# EAGLE board SonarBoardV2 (EAGLE 7.2.0)
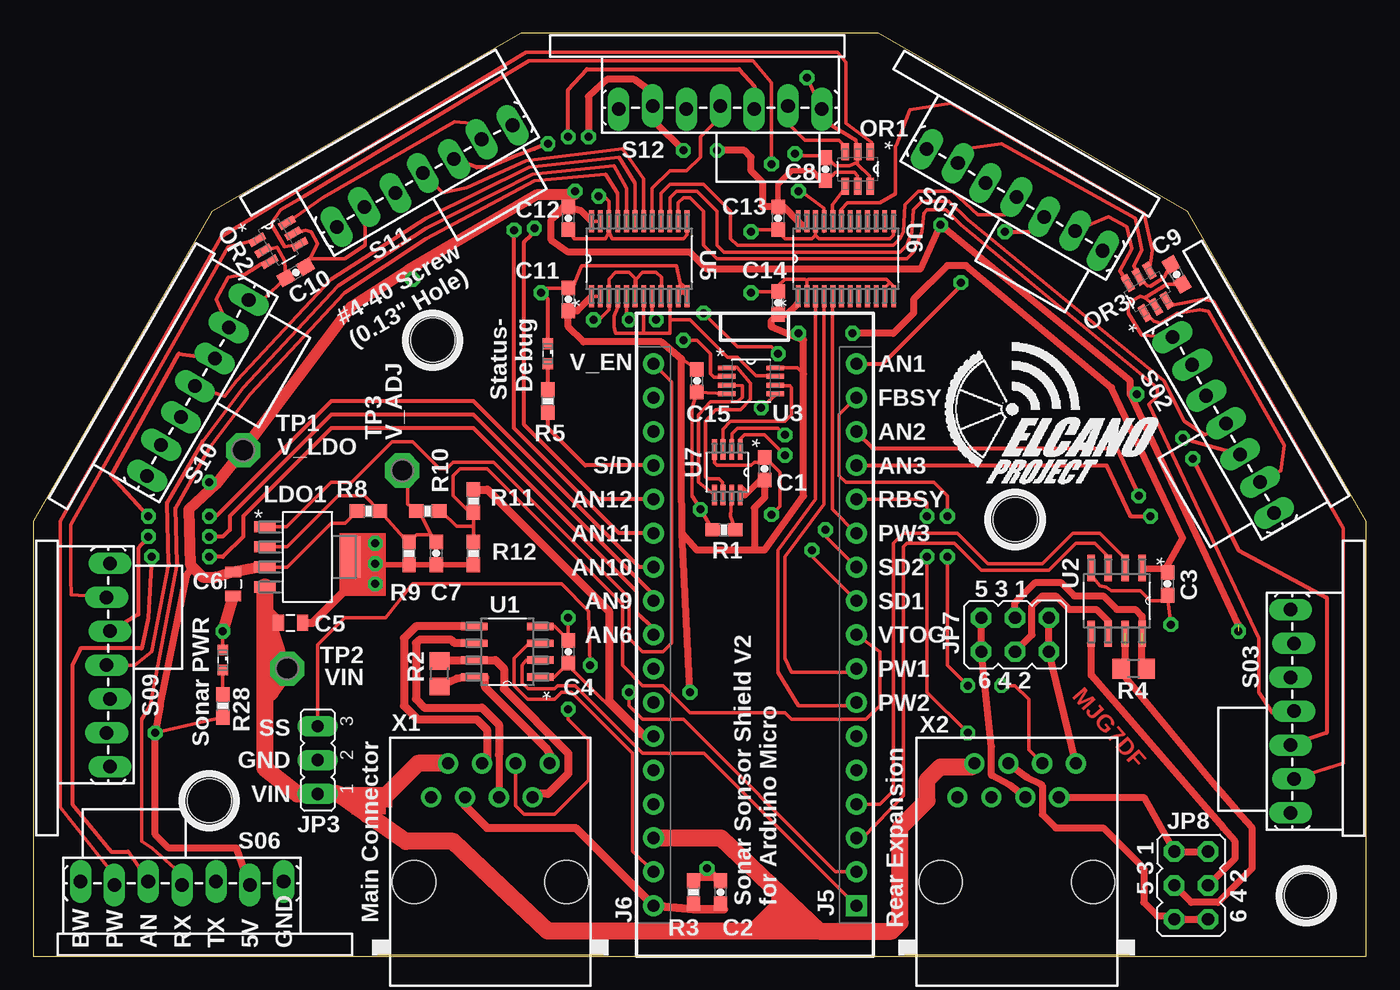
[diagram p0: board, top side]
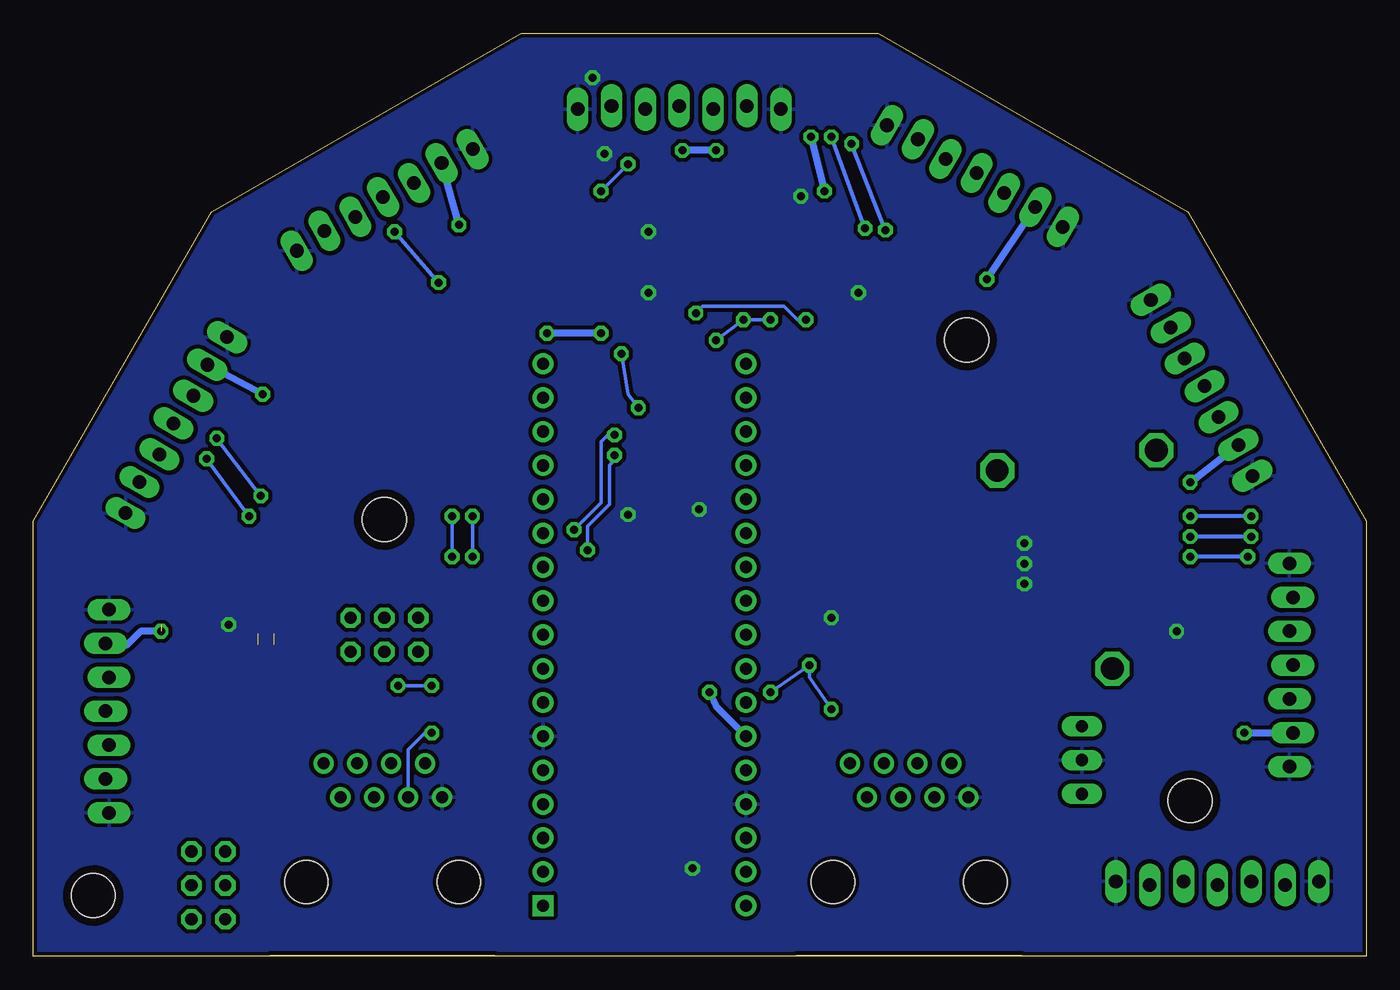
[diagram p1: board, bottom side, seen from below]

Size 100 x 69.24 mm. Coordinates in mm from the lower left corner, seen from the top.
Outline: 0,0 100,0 100,32.63 86.6,55.84 63.4,69.24 36.6,69.24 13.4,55.84 0,32.63 0,0
Copper layers (1*16): Top 0.035mm / dielectric 1.5mm / Bottom 0.035mm
Design rules "SparkFun *": minimum track width 8mil, minimum drill 20mil, track to track 10mil, track to pad 10mil, pad to pad 8mil, via to via 8mil, smd to smd 8mil, copper to edge 10mil, drill to drill 8mil, minimum pad ring 12mil, minimum via ring 10mil, stop-mask expansion 4mil, vias tented up to drill 25mil, thermal gap 10mil
Net classes: 0 default: width 0.254 mm, drill 0.508 mm, clearance 0.203 mm

## Footprints (pad centres in the part's own frame; a part is rotated, then mirrored left to right if it is on the bottom)
0603-CAP = smd 1.1 x 1: 1 -0.85,0; 2 0.85,0
0805 = smd 0.8 x 1.2: 1 -0.9,0; 2 0.9,0
HEAD17-NOSS = drill 0.914 pad 1.575 square: 1 0,0 | drill 0.914 pad 1.575: 2 2.54,0; 3 5.08,0; 4 7.62,0; 5 10.16,0; 6 12.7,0; 7 15.24,0; 8 17.78,0; 9 20.32,0; 10 22.86,0; 11 25.4,0; 12 27.94,0; 13 30.48,0; 14 33.02,0; 15 35.56,0; 16 38.1,0; 17 40.64,0
HEAD17-NOSS-1 = drill 0.914 pad 1.575: 1 0,0; 2 2.54,0; 3 5.08,0; 4 7.62,0; 5 10.16,0; 6 12.7,0; 7 15.24,0; 8 17.78,0; 9 20.32,0; 10 22.86,0; 11 25.4,0; 12 27.94,0; 13 30.48,0; 14 33.02,0; 15 35.56,0; 16 38.1,0; 17 40.64,0
JP2 = drill 0.914 long: 1 -2.54,0; 2 0,0; 3 2.54,0
JP3Q = drill 0.914 octagon: 1 -2.54,-1.27; 2 -2.54,1.27; 3 0,-1.27; 4 0,1.27; 5 2.54,-1.27; 6 2.54,1.27
SOT150P696X180-5N = smd 1.6 x 0.838: 1 -3.2,2.261; 2 -3.2,0.762; 3 -3.2,-0.762; 4 -3.2,-2.261 | smd 1.6 x 3.099: 5 3.2,0
SML0603 = smd 0.8 x 0.8: A 0.75,0; C -0.75,0
SOT95P280X145-6N = smd 1.27 x 0.559: 1 -1.295,0.94; 2 -1.295,0; 3 -1.295,-0.94; 4 1.295,-0.94; 5 1.295,0; 6 1.295,0.94
0603-RES = smd 1.1 x 1: 1 -0.85,0; 2 0.85,0
R0805 = smd 1.3 x 1.5: 1 -0.95,0; 2 0.95,0
XL-MAXSONAR-PACKAGE = drill 1.016 long: 1 -9.16,0.167; 2 -6.62,-0.087; 3 -4.08,0.167; 4 -1.54,-0.087; 5 1,0.167; 6 3.54,-0.087; 7 6.08,0.167
P1-17 = drill 1.702 pad 2.54 octagon: TP 0,0
SOIC127O620X175-8N = smd 1.981 x 0.559: 1 -2.464,1.905; 2 -2.464,0.635; 3 -2.464,-0.635; 4 -2.464,-1.905; 5 2.464,-1.905; 6 2.464,-0.635; 7 2.464,0.635; 8 2.464,1.905
SOP65P400X130-8N = smd 1.321 x 0.356: 1 -1.829,0.965; 2 -1.829,0.33; 3 -1.829,-0.33; 4 -1.829,-0.965; 5 1.829,-0.965; 6 1.829,-0.33; 7 1.829,0.33; 8 1.829,0.965
SOP65P640X120-24N = smd 1.651 x 0.356: 1 -2.819,3.581; 2 -2.819,2.921; 3 -2.819,2.286; 4 -2.819,1.626; 5 -2.819,0.965; 6 -2.819,0.33; 7 -2.819,-0.33; 8 -2.819,-0.965; 9 -2.819,-1.626; 10 -2.819,-2.286; 11 -2.819,-2.921; 12 -2.819,-3.581; 13 2.819,-3.581; 14 2.819,-2.921; 15 2.819,-2.286; 16 2.819,-1.626; 17 2.819,-0.965; 18 2.819,-0.33; 19 2.819,0.33; 20 2.819,0.965; 21 2.819,1.626; 22 2.819,2.286; 23 2.819,2.921; 24 2.819,3.581
SOP65P400X130-8N@1 = smd 1.549 x 0.356: 1 -1.702,0.965; 2 -1.702,0.33; 3 -1.702,-0.33; 4 -1.702,-0.965; 5 1.702,-0.965; 6 1.702,-0.33; 7 1.702,0.33; 8 1.702,0.965
STAND-OFF = hole 3.302: 0,0
RJ45-NO-SHIELD = drill 0.9 pad 1.4: 1 -4.445,6.35; 2 -3.175,8.89; 3 -1.905,6.35; 4 -0.635,8.89; 5 0.635,6.35; 6 1.905,8.89; 7 3.175,6.35; 8 4.445,8.89 | hole 3.251: -5.715,0; 5.715,0

## Placement (x,y rotation side)
C1  0.1uF  [0603-CAP]  54.86,36.58 90 top
C2  DNS  [0603-CAP]  51.56,4.83 90 top
C3  0.1uF  [0603-CAP]  85.09,27.94 270 top
C4  0.1uF  [0603-CAP]  40.13,22.86 90 top
C5  10uF, 25V  [0805]  19.3,25.02 0 top
C6  10uF, 25V  [0805]  14.99,27.94 270 top
C7  DNS  [0603-CAP]  30.23,30.23 270 top
C8  0.1uF  [0603-CAP]  59.44,59.05 90 top
C9  0.1uF  [0603-CAP]  85.78,51.15 300 top
C10  0.1uF  [0603-CAP]  19.68,51.31 210 top
C11  0.1uF  [0603-CAP]  40.13,49.28 90 top
C12  0.1uF  [0603-CAP]  40.13,55.37 270 top
C13  0.1uF  [0603-CAP]  55.88,55.37 270 top
C14  0.1uF  [0603-CAP]  55.88,49.02 90 top
C15  0.1uF  [0603-CAP]  49.78,43.18 270 top
J5  HEAD17-NOSS  [HEAD17-NOSS]  61.76,3.81 90 top
J6  HEAD17-NOSS-1  [HEAD17-NOSS-1]  46.52,3.81 90 top
JP3  [JP2]  21.34,14.73 90 top
JP7  [JP3Q]  73.66,24.13 180 top
JP8  [JP3Q]  86.87,5.33 270 top
LDO1  LP38693MP-ADJ  [SOT150P696X180-5N]  20.57,29.97 0 top
LED1  [SML0603]  14.22,22.23 270 top
LED2  [SML0603]  38.61,45.21 270 top
OR1  SN74LVC1G332DBVR  [SOT95P280X145-6N]  61.85,59.05 270 top
OR2  SN74LVC1G332DBVR  [SOT95P280X145-6N]  18.39,53.58 30 top
OR3  SN74LVC1G332DBVR  [SOT95P280X145-6N]  83.57,49.85 120 top
R1  0  [0603-RES]  51.82,32 180 top
R2  100  [R0805]  30.48,21.21 90 top
R3  DNS  [0603-RES]  49.53,4.83 270 top
R4  100  [R0805]  82.55,21.59 180 top
R5  600  [0603-RES]  38.61,41.66 90 top
R8  33k  [0603-RES]  25.15,33.4 180 top
R9  12k  [0603-RES]  28.19,30.23 90 top
R10  100k  [0603-RES]  29.59,33.4 180 top
R11  DNS  [0603-RES]  33.02,34.16 90 top
R12  DNS  [0603-RES]  33.02,30.23 90 top
R28  600  [0603-RES]  14.22,18.8 90 top
S01  MaxSonar  [XL-MAXSONAR-PACKAGE]  72.39,57.66 150 top
S02  MaxSonar  [XL-MAXSONAR-PACKAGE]  88.65,41.27 120 top
S03  MaxSonar  [XL-MAXSONAR-PACKAGE]  94.49,19.94 90 top
S06  MaxSonar  [XL-MAXSONAR-PACKAGE]  12.7,5.46 0 top
S09  MaxSonar  [XL-MAXSONAR-PACKAGE]  5.59,20.32 270 top
S10  MaxSonar  [XL-MAXSONAR-PACKAGE]  11.43,41.4 240 top
S11  MaxSonar  [XL-MAXSONAR-PACKAGE]  27.94,57.91 210 top
S12  MaxSonar  [XL-MAXSONAR-PACKAGE]  50,63.71 180 top
TP1  TPPAD1-17  [P1-17]  15.75,37.97 0 top
TP2  TPPAD1-17  [P1-17]  19.05,21.59 270 top
TP3  TPPAD1-17  [P1-17]  27.69,36.45 0 top
U1  DS8921M  [SOIC127O620X175-8N]  35.56,22.86 180 top
U2  DS8921M  [SOIC127O620X175-8N]  81.28,26.67 270 top
U3  SN74LVC3G14DCTR  [SOP65P400X130-8N]  53.85,43.18 0 top
U5  SN74LVCH8T245PWR  [SOP65P640X120-24N]  45.47,52.32 90 top
U6  SN74LVCH8T245PWR  [SOP65P640X120-24N]  60.96,52.32 90 top
U7  SN74LVC1G139DCTR  [SOP65P400X130-8N@1]  52.07,36.32 270 top
U$15  [STAND-OFF]  29.97,46.23 0 top
U$16  [STAND-OFF]  73.66,32.77 0 top
U$17  [STAND-OFF]  95.5,4.57 0 top
U$18  [STAND-OFF]  13.21,11.68 0 top
X1  RJ45-8L-B  [RJ45-NO-SHIELD]  34.29,5.59 0 top
X2  RJ45-8L-B  [RJ45-NO-SHIELD]  73.79,5.59 0 top

## Library data of the parts
C1-C15 R1 R3 R5 R8-R12 R28 = SparkFun-Passives
J5 J6 = SmartPrj
JP3 JP7 JP8 = jumper
LDO1 = ElcanoProject; MPN: LP38693MP-ADJ; OC_FARNELL: 1685718; OC_NEWARK: 41K7493; PACKAGE: SOT-223-5; SUPPLIER: NationalSemiconductor
LED1 LED2 = led
OR1-OR3 = ElcanoProject; MPN: SN74LVC1G332DBVR; OC_FARNELL: 1410355; OC_NEWARK: 87H2663; PACKAGE: SOT-23-6; SUPPLIER: TEXAS INSTRUMENTS
R2 R4 = rcl
S01-S03 S06 S09 S10-S12 = ElcanoProject
TP1-TP3 = testpad
U1 U2 = ElcanoProject; MPN: DS8921M; OC_FARNELL: -; OC_NEWARK: 41K1928; PACKAGE: SOIC-8; SUPPLIER: National Semiconductor
U3 = ElcanoProject; MPN: SN74LVC3G14DCTR; OC_FARNELL: -; OC_NEWARK: 76C4267; PACKAGE: SSOP-8; SUPPLIER: TEXAS INSTRUMENTS
U5 U6 = ElcanoProject; MPN: SN74LVCH8T245PWR; OC_FARNELL: 2120445; OC_NEWARK: 94T5041; PACKAGE: TSSOP-24; SUPPLIER: TEXAS INSTRUMENTS
U7 = ElcanoProject; MPN: SN74LVC1G139DCTR; OC_FARNELL: Unknown; OC_NEWARK: 94T5046; PACKAGE: SSOP-8; SUPPLIER: TEXAS INSTRUMENTS
U$15-U$18 = SparkFun-Electromechanical
X1 X2 = con-tycoelectronics; MF: TYCO ELECTRONICS; MPN: RJ45-8L-B; OC_FARNELL: 1279843; OC_NEWARK: 52K4445

## Nets
3V3: J6.16
+5V: C1.1 C3.1 C4.1 C11.1 C14.1 C15.1 J6.6 R11.2 U1.1 U2.1 U3.8 U5.1 U5.2 U6.1 U7.8
A0: J6.14 R5.1
AN1: J5.17 S01.3
AN2: J5.15 S02.3
AN3: J5.14 S03.3
AN6: J6.9 S06.3
AN9: J6.10 S09.3
AN10: J6.11 S10.3
AN11: J6.12 S11.3
AN12: J6.13 S12.3
AREF: J6.15
F_BSY: J5.16 X2.6
G01: U3.7 U5.4 U5.7 U5.10
G10: U3.5 U5.3 U5.6 U5.9
G11: U3.2 U5.5 U5.8
GND: C1.2 C2.2 C3.2 C4.2 C5.2 C6.2 C7.2 C8.2 C9.2 C10.2 C11.2 C12.2 C13.2 C14.2 C15.2 J5.6 J6.4 JP3.2 LDO1.5 LED1.C LED2.C OR1.2 OR1.6 OR2.2 OR3.2 R1.2 R3.1 R9.1 R12.1 S01.1 S01.7 S02.1 S02.7 S03.1 S03.7 S06.1 S06.7 S09.1 S09.7 S10.1 S10.7 S11.1 S11.7 S12.1 S12.7 U1.4 U2.4 U3.4 U5.11 U5.12 U5.13 U5.22 U6.2 U6.11 U6.12 U6.13 U6.22 U7.4 X1.1 X2.1
MISO: J6.2 U1.3
MISO+: U1.6 X1.5
MISO-: U1.5 X1.4
MOSI: J5.1 U1.2
MOSI+: R2.1 U1.8 X1.8
MOSI-: R2.2 U1.7 X1.7
MRX+_STX+: JP7.1 JP7.2 X2.8
MRX-_STX-: JP8.1 JP8.2 X2.7
MTX+_SRX+: JP7.5 JP7.6 X2.5
MTX-_SRX-: JP8.5 JP8.6 X2.4
N$2: LED2.A R5.2
N$14: LED1.A R28.2
N$15: U3.1 U7.6
N$18: U3.3 U7.5
N$19: U3.6 U7.3
N$20: R1.1 U7.7
N$43: OR1.4 U6.20
N$44: OR2.4 U6.21
N$45: OR3.4 U6.19
PW1: OR3.6 S01.2
PW2: OR3.1 S02.2
PW3: OR3.3 S03.2
PW6: OR1.1 S06.2
PW9: OR2.1 S09.2
PW10: OR2.3 S10.2
PW11: OR2.6 S11.2
PW12: OR1.3 S12.2
PW_OR1: J5.8 U6.4
PW_OR2: J5.7 U6.3
PW_OR3: J5.12 U6.5
R_BSY: J5.13 X2.3
RX: J5.4 U2.2
RX1: S01.4 U5.16
RX2: S02.4 U5.15
RX3: S03.4 U5.14
RX6: S06.4 U5.21
RX9: S09.4 U5.20
RX10: S10.4 U5.19
RX11: S11.4 U5.18
RX12: S12.4 U5.17
RX+: JP7.3 R4.1 U2.8
RX-: JP8.3 R4.2 U2.7
S_DEC_1: J5.10 U7.1
S_DEC_2: J5.11 U7.2
SCK: C2.1 J6.1 R3.2 X1.3
SS: J5.2 JP3.3 X1.6
TX: J5.3 U2.3
TX+: JP7.4 U2.6
TX-: JP8.4 U2.5
V_ADJ: C7.1 LDO1.2 R8.1 R9.2 R10.2 TP3.TP
V_EN: J6.17 LDO1.1
V_LDO: C6.1 C8.1 C9.1 C10.1 C12.1 C13.1 LDO1.3 OR1.5 OR2.5 OR3.5 R8.2 R28.1 S01.6 S02.6 S03.6 S06.6 S09.6 S10.6 S11.6 S12.6 TP1.TP U5.23 U5.24 U6.23 U6.24
V_TOGGLE: J5.9 R10.1 R11.1 R12.2
VIN: C5.1 J6.3 JP3.1 LDO1.4 TP2.TP X1.2 X2.2

## Tracks (layer width: path | path; a pad name or v marks a point on that pad's centre or on a via)
+5V  (via drill 0.6)
  Top 0.254: U2.1 84.75,29.13 C3.1 | U1.1 39.08,20.95 C4.1 40.13,21.84 45.47,16.51 45.85,16.51 | 57.28,48.9 57.28,49.4 U6.1 | 53.11,34.54 U7.8 53.21,34.8 53.21,35.18 53.34,35.05 53.34,34.54 | U5.1 U5.2 | 48.64,44.83 C15.1 | U3.8 57.33,44.15 57.78,43.69
  Top 0.406: 54.52,35.73 53.34,34.54
  Top 0.508: 57.28,48.9 56.55,48.17 C14.1 55.37,47.66 55.37,47.24 57.78,46.23 | 54.52,35.73 C1.1 54.86,34.42 54.1,33.66 54.1,30.48 | v49.28,19.81 48.65,31.74 | 48.65,31.74 48.64,36.32 48.64,44.83 47.12,46.1 41.27,46.1 40.13,47.24 C11.1 40.81,48.43 U5.1 | 57.78,46.23 57.78,43.69 57.78,34.54 54.86,30.48 54.1,30.48 | 57.78,46.23 v57.4,46.74 | 54.1,30.48 49.78,30.48 48.65,31.74 | 45.85,16.51 J6.6 | U2.1 84.96,29.08 86.23,31.37 80.9,42.67 69.98,51.82 68.58,51.82 66.04,49.28 66.04,48.26 64.52,46.74 v61.47,46.74
  Top 0.61: R11.2 34.08,35.01 43.18,25.91 43.18,19.18 45.85,16.51
  Bottom 0.508: v49.28,19.81 48.77,18.76 J6.6 | v57.4,46.74 v61.47,46.74
A0
  Top 0.305: J6.14 41.4,36.83 38.61,39.62 R5.1
AN1  (via drill 0.6)
  Top 0.305: J5.17 63.75,44.45 69.6,50.29 v69.6,50.55 | v72.9,54.36 74.72,54.36 S01.3
  Bottom 0.305: v69.6,50.55 v72.9,54.36
AN2  (via drill 0.6)
  Top 0.305: J5.15 61.76,39.33 62.99,38.1 81.28,38.1 v82.93,34.54 | v86.23,38.86 88.9,38.1 S02.3
  Bottom 0.305: v82.93,34.54 v86.23,38.86
AN3  (via drill 0.6)
  Top 0.305: J5.14 80.52,36.83 82.3,33.02 v83.82,33.02 | v87,37.34 90.42,30.48 97.03,26.92 97.03,16.76 S03.3
  Bottom 0.305: v83.82,33.02 v87,37.34
AN6  (via drill 0.6)
  Top 0.305: J6.9 46.52,24.6 45.29,25.73 45.29,27.36 33.02,39.62 22.35,39.62 15.75,33.02 15.75,31.5 14.22,29.97 v13.21,29.97 | v8.89,29.97 8.64,25.4 8.13,23.11 3.56,23.11 2.92,21.84 2.92,11.43 5.84,7.87 7.11,7.87 S06.3
  Bottom 0.305: v8.89,29.97 v13.21,29.97
AN9  (via drill 0.6)
  Top 0.305: J6.10 46.52,27.14 33.02,40.64 22.35,40.64 14.73,33.02 14.73,32 14.22,31.5 v13.21,31.5 | v8.64,31.5 7.87,30.61 7.87,25.65 S09.3
  Bottom 0.305: v8.64,31.5 v13.21,31.5
AN10  (via drill 0.6)
  Top 0.305: J6.11 45.47,29.21 33.02,41.66 22.35,41.66 13.72,33.02 v13.21,33.02 | v8.64,33.02 5.84,36.07 10.92,45.21 S10.3
  Bottom 0.305: v8.64,33.02 v13.21,33.02
AN11  (via drill 0.6)
  Top 0.305: J6.12 43.94,31.75 36.07,39.62 v36.07,54.48 | v38.61,60.96 38.23,60.83 37.59,60.58 35.94,59.94 34.16,59.18 33.27,59.18 S11.3
  Bottom 0.305: v36.07,54.48 v38.61,60.96
AN12  (via drill 0.6)
  Top 0.305: J6.13 42.42,34.29 36.83,39.88 36.83,53.59 37.34,54.1 37.34,54.36 v37.59,54.61 | v40.13,61.47 40.13,65.02 41.53,66.55 52.96,66.55 54.1,65.28 54.1,63.57 S12.3
  Bottom 0.305: v37.59,54.61 v40.13,61.47
F_BSY  (via drill 0.6)
  Top 0.254: J5.16 61.72,41.91 60.45,40.64 60.45,36.07 60.96,35.56 67.56,35.56 68.58,34.54 v68.58,33.02 | v68.58,29.97 68.58,21.84 v70.1,20.32 | v72.64,20.32 73.66,20.32 74.68,19.3 74.68,15.49 X2.6
  Bottom 0.254: v68.58,33.02 v68.58,29.97 | v72.64,20.32 v70.1,20.32
G01
  Top 0.254: U5.10 47.75,47.75 | 45.8,46.74 47.75,46.74 47.75,47.75 | 45.8,46.74 43.69,46.74 43.56,47.24 43.56,48.01 43.81,48.64 43.81,49.48 U5.4 | U5.7 45.8,46.74 | 47.75,47.75 49.28,47.75 52.07,44.96 52.83,44.96 54.23,43.56 55.63,43.56 U3.7
G10  (via drill 0.6)
  Top 0.254: 45.21,50.8 44.7,51.31 43.69,51.31 43.18,50.8 U5.3 43.18,48.51 42.55,47.88 42.16,47.88 v42.04,47.75 | 45.21,50.8 45.21,49.58 U5.6 45.14,50.72 45.21,50.8 | 45.21,50.8 45.72,51.31 46.74,51.31 47.12,50.93 47.12,49.53 U5.9 | v50.29,48.26 52.83,45.72 55.37,45.72 v55.88,45.21 | U3.5 55.68,42.09 v54.61,41.15
  Bottom 0.254: v42.04,47.75 42.67,47.75 43.69,48.77 49.78,48.77 v50.29,48.26 | v55.88,45.21 55.37,42.16 v54.61,41.15
G11  (via drill 0.6)
  Top 0.254: U5.5 44.5,47.8 v44.7,47.75 | U5.8 46.43,48.06 v46.74,47.75 | v48.77,46.23 49.78,46.23 50.8,45.21 50.8,43.69 51.05,43.43 51.94,43.43 U3.2
  Bottom 0.254: v44.7,47.75 v46.74,47.75 v48.77,46.23
GND  (via drill 0.6, 0.6 pad 0.3)
  Top 0.254: LED1.C v14.22,24.38 | v25.65,30.99 24.79,30.99 LDO1.5 | 23.88,29.46 v25.65,29.46 25.74,29.38 | v25.65,27.94 24.89,27.94 23.88,28.96 | OR1.2 61.85,59.44 62.74,58.55 62.74,57.81 OR1.6 | OR1.2 61.85,59.56 61.21,59.31 60.2,59.31 59.6,59.91 C8.2 | 59.31,60.29 59.31,60.07 57.28,60.07 v57.15,60.2 | OR2.2 18.29,53.19 18.87,52.2 C10.2 18.88,50.88 17.27,49.28 16.18,49.28 S10.1 | OR3.2 83.39,49.4 | 83.39,49.4 83.06,49.53 82.17,49.02 82.17,48.26 83.19,46.61 S02.7 | OR1.2 61.72,61.21 59.44,62.61 S12.1 v58.04,65.91 | C9.2 85.22,50.42 85.04,50.42 83.39,49.4 | U2.4 79.38,28.57 80.01,27.81 80.52,27.69 80.9,27.43 83.06,27.43 83.82,26.67 84.67,26.67 C3.2 v85.34,24.89 | U1.4 39.12,24.77 40.13,23.75 C4.2 v40.13,25.4 | 43.18,54.36 U5.22 43.18,56.64 42.93,56.9 42.55,56.9 v42.42,57.02 | 43.18,54.36 42.93,53.85 40.55,53.85 C12.2 | 48.51,50.55 48.26,51.82 41.15,51.82 40.47,50.13 C11.2 38.44,50.13 v38.1,49.78 | U5.12 48.77,49.78 48.77,50.29 48.51,50.55 | 48.51,50.55 48.51,50.16 48.64,50.04 48.64,49.76 U5.11 | U5.13 49.05,54.13 48.77,53.85 43.43,53.85 43.18,54.36 | 58.67,54.1 58.42,53.85 56.39,53.85 55.88,54.36 C13.2 54.01,54.52 v53.85,54.36 | U6.22 58.67,54.1 | 58.67,54.1 58.93,53.85 64.26,53.85 64.52,54.1 64.52,55.12 U6.13 | v53.85,49.78 53.94,49.87 C14.2 55.88,50.29 56.39,50.8 57.91,50.8 58.04,50.67 | 58.04,50.67 U6.2 | 64.26,50.55 64.01,50.8 58.17,50.8 58.04,50.67 | U6.12 64.54,50.27 64.26,50.55 | 64.26,50.55 63.88,50.16 U6.11 | U7.4 51.1,37.03 51.31,36.83 53.85,36.83 54.1,37.08 54.52,37.08 C1.2 54.9,37.43 56.01,36.32 56.01,33.78 v55.37,33.15 | R1.2 v50.04,33.53 49.4,34.54 49.4,41.15 C15.2 U3.4
  Top 0.305: LED2.C 38.61,49.28 v38.1,49.78
  Top 0.406: 25.74,29.38 R9.1 C7.2 R12.1
  Top 0.508: 51.05,5.97 51.05,6.1 v50.55,6.6
  Top 0.61: C5.2 20.95,25.02 23.88,27.94 23.88,28.96 23.88,29.46 23.88,29.87 LDO1.5
  Top 0.635: R3.1 50.04,5.97 51.05,5.97 C2.2
  Top 0.813: C6.2 v14.22,24.38
  pour Bottom (isolate 0.305): 0,0 100.08,0 100.08,32.51 86.61,55.88 63.37,69.22 36.58,69.22 13.46,55.88 0,32.64
MISO
  Top 0.254: U1.3 37.21,23.5 36.07,22.35 36.07,20.32 37.08,19.3 39.12,19.3 39.62,19.81 40.39,19.81 44.96,15.24 44.96,7.91 J6.2
MISO+
  Top 0.508: 34.92,15.11 X1.5
  Top 0.61: U1.6 31.62,23.5 31.37,23.75 28.96,23.75 28.7,23.5 28.7,19.3 29.34,18.67 33.66,18.67 34.92,17.4 34.92,15.11
MISO-
  Top 0.61: U1.5 28.7,24.77 27.81,23.88 27.81,18.8 28.83,17.78 33.27,17.78 34.04,17.02 34.04,14.86 X1.4
MOSI
  Top 0.254: U1.2 36.96,22.23 36.65,21.84 36.65,20.5 37.11,20.07 39.09,20.07 39.34,20.32 40.64,20.32 45.72,15.24 50.33,15.24 J5.1
MOSI+
  Top 0.61: R2.1 31.79,20.87 32.26,20.95 U1.8 | U1.8 33.27,20.95 | X1.8 38.99,14.73 38.48,15.62 33.91,20.19 33.91,20.93 33.12,20.93 U1.8
MOSI-
  Top 0.61: R2.2 30.48,22.35 30.61,22.23 U1.7 34.67,22.23 35.31,21.59 35.31,20.07 40.13,15.24 40.13,13.72 38.61,12.19 37.72,12.19 X1.7
MRX+_STX+
  Top 0.508: X2.8 JP7.2 JP7.1
MRX-_STX-
  Top 0.508: X2.7 83.31,11.94 JP8.1 JP8.2
MTX+_SRX+
  Top 0.508: X2.5 73.28,12.83 71.88,13.59 71.88,15.75 JP7.6 JP7.5
MTX-_SRX-
  Top 0.508: X2.4 74.55,13.46 75.56,12.95 75.69,12.83 75.69,10.67 76.71,9.65 80.26,9.65 83.31,6.6 83.31,4.06 84.33,3.05 85.34,3.05 JP8.5 JP8.6
N$1
  pour Top: 23.37,12.19 26.42,12.19 26.42,9.65 22.86,12.19
N$2
  Top 0.305: R5.2 LED2.A
N$14
  Top 0.254: LED1.A R28.2
N$15
  Top 0.254: U7.6 51.69,35.56 51.44,35.81 50.67,35.81 50.42,35.94 50.42,40.13 51.18,41.02 53.06,41.02 53.82,41.78 53.82,43 52.78,44.2 52.7,44.2 U3.1
N$18
  Top 0.254: U7.5 49.91,35.56 49.91,40.64 50.8,41.6 52.83,41.6 53.19,41.96 53.19,42.8 U3.3
N$19
  Top 0.254: U7.3 51.74,39.55 52.32,40.13 56.39,40.13 56.9,40.64 56.9,42.67 56.77,42.8 55.73,42.8 U3.6
N$20
  Top 0.254: U7.7 52.32,33.02 R1.1
N$43
  Top 0.254: OR1.4 60.91,57.61 59.94,56.39 59.94,54.43 U6.20
N$44  (via drill 0.6)
  Top 0.254: OR2.4 18.87,53.21 17.86,54.94 18.54,56.01 20.32,57.02 37.21,67.18 53.98,67.18 55.37,65.53 v55.37,59.44 | U6.21 59.31,54.41 59.31,56.13 57.4,57.53 v57.4,57.4
  Bottom 0.254: v55.37,59.44 v57.4,57.4
N$45
  Top 0.254: OR3.4 83.95,52.96 83.31,55.75 68.83,64.01 65.79,63.5 64.77,60.83 64.69,60.76 64.69,57.2 63.5,56.52 61.09,56.52 60.58,56.01 60.58,55.19 U6.19 60.71,54.46
PW1
  Top 0.254: OR3.6 81.53,51.44 82.42,53.09 82.04,54.74 80.64,55.5 S01.2
PW2
  Top 0.254: OR3.1 84.07,47.62 84.58,47.5 85.85,48.26 87.5,48.51 88.14,48.39 93.85,38.35 93.6,36.45 S02.2
PW3
  Top 0.254: OR3.3 85.6,48.9 87.76,49.28 88.52,49.15 98.3,32.13 98.3,14.48 S03.2
PW6
  Top 0.254: S06.2 6.08,6.11 2.03,11.18 2.03,32.64 14.1,53.98 36.96,67.82 60.33,67.82 60.96,67.06 60.96,62.48 62.87,61.09 62.87,60.43 OR1.1 62.74,60.83
PW9
  Top 0.254: S09.2 2.83,27.14 2.79,28.32 2.79,32.38 14.61,53.21 OR2.1
PW10
  Top 0.254: S10.2 13.72,49.28 14.61,50.93 15.88,51.18 17.14,51.94 OR2.3
PW11
  Top 0.254: OR2.6 21.72,56.9 31.62,62.61 32.89,62.48 S11.2
PW12
  Top 0.254: S12.2 56.62,62.51 57.91,61.21 60.45,61.21 60.71,60.96 60.71,60.55 OR1.3 60.96,60.4
PW_OR1
  Top 0.254: U6.4 59.33,33.93 56.39,29.97 56.39,22.35 56.9,21.34 61.51,21.34 J5.8
PW_OR2
  Top 0.254: U6.3 58.67,34.29 55.88,30.48 55.88,21.34 57.4,18.8 61.51,18.8 J5.7
PW_OR3
  Top 0.254: J5.12 61.72,31.75 59.94,33.53 59.94,49.45 U6.5
R_BSY  (via drill 0.6)
  Top 0.254: J5.13 66.8,34.29 67.06,34.04 v67.06,33.02 | v67.06,29.97 67.06,19.81 v70.1,16.76
  Bottom 0.254: v67.06,33.02 v67.06,29.97 | v70.1,16.76 70.61,16.76 71.88,15.49 X2.3
RX
  Top 0.254: U2.2 81.92,29.84 80.01,31.75 77.98,31.75 75.69,29.46 71.63,29.46 69.34,31.75 65.28,31.75 64.52,30.99 64.52,12.45 63.5,11.43 J5.4
RX1
  Top 0.254: U5.16 47.09,57.25 47.75,57.91 50.29,57.91 52.32,55.88 52.32,53.85 52.83,53.34 64.52,53.34 65.02,53.85 65.28,54.36 65.41,56.39 66.42,57.4 68.96,57.4 70.87,55.63 72.9,55.63 S01.4
RX2
  Top 0.254: U5.15 47.75,56.9 48.26,57.4 49.78,57.4 51.31,55.88 51.31,53.34 51.82,52.83 65.02,52.83 65.53,53.34 65.91,54.36 66.04,56.01 66.67,56.64 68.71,56.64 70.1,55.24 84.84,43.18 86.36,40.13 87.88,39.12 S02.4
RX3
  Top 0.254: U5.14 48.39,56.52 48.77,56.9 49.28,56.9 50.29,55.88 50.29,53.34 51.31,52.32 65.53,52.32 66.04,52.83 66.67,54.36 66.8,55.75 67.06,56.01 68.45,56.01 69.6,54.86 84.33,42.67 84.33,42.04 83.69,41.4 91.95,23.88 91.95,19.81 92.96,18.29 S03.4
RX6
  Top 0.254: U5.21 43.84,57.25 42.93,58.67 37.59,58.17 29.46,53.85 23.37,49.78 16.26,42.16 13.21,38.1 | 10.79,29.46 8.76,18.8 8.13,17.78 8.13,8.64 8.91,8.13 10.59,6.63 S06.4
  Top 0.305: 10.79,29.46 10.67,33.66 13.21,38.1
RX9
  Top 0.254: U5.20 44.5,57.61 43.56,59.31 37.47,58.67 29.46,54.61 22.86,50.29 15.75,42.67 12.7,38.61 | 10.16,29.46 8.89,22.86 7.62,21.84 S09.4
  Top 0.305: 10.16,29.46 10.03,34.04 12.7,38.61
RX10
  Top 0.254: U5.19 45.14,57.99 43.94,59.94 37.21,59.18 29.46,55.37 22.35,50.8 15.24,43.18 14.35,42.04 S10.4
RX11
  Top 0.254: U5.18 45.8,58.34 44.2,60.58 36.96,59.69 32.51,57.66 30.71,57.28 S11.4
RX12
  Top 0.254: U5.17 46.43,57.61 47.75,58.93 49.02,58.93 50.04,59.94 50.04,61.47 51.69,63.12 51.69,63.65 S12.4
RX+  (1 unrouted)
  Top 0.508: JP7.3 73.66,26.54 75.18,28.07 77.09,28.07 78.11,27.05 80.26,27.05 81.28,26.04 82.68,26.04 83.19,25.53 U2.8 | R4.1 83.4,21.88 83.19,22.1 83.19,23.37
RX-  (1 unrouted)
  Top 0.508: 81.92,23.37 81.92,22.1 81.7,21.88 R4.2 81.92,21.38 81.92,20.95 88.65,12.83 90.3,10.92 91.44,9.65 91.44,6.6 88.9,4.06 86.87,4.06 JP8.3
S_DEC_1  (via drill 0.6)
  Top 0.254: U7.1 53.03,38.81 53.34,39.12 54.86,39.12 v56.39,37.59 | v58.42,30.48 58.42,30.01 J5.10
  Bottom 0.254: v56.39,37.59 56.39,37.21 56.77,36.83 56.77,33.91 58.42,32.26 v58.42,30.48
S_DEC_2  (via drill 0.6)
  Top 0.254: U7.2 52.4,39.19 52.83,39.62 55.88,39.62 v56.39,39.12 | v59.44,32 59.44,31.53 J5.11
  Bottom 0.254: v56.39,39.12 56.9,39.12 57.4,38.61 57.4,34.04 v59.44,32
SCK
  Top 0.61: R3.2 49.53,3.56 | X1.3 32.38,11.3 34.04,9.65 40.68,9.65 J6.1
  Top 0.635: J6.1 49.53,3.56 51.82,3.56 C2.1
SS  (via drill 0.6)
  Top 0.254: J5.2 60.2,6.35 48.77,17.78 45.72,17.78 44.7,18.8 v44.7,19.81 | v41.78,21.84 41.66,25.91 39.62,27.94 28.45,27.94 26.42,25.4 23.37,25.4 21.34,23.37 JP3.3 | X1.6 36.2,11.3 36.83,10.67 39.12,10.67 41.66,13.21 41.66,16.26 40.13,17.78 v40.13,18.54
  Bottom 0.254: v44.7,19.81 v41.78,21.84 41.78,20.95 v40.13,18.54
TX
  Top 0.254: U2.3 80.64,29.97 79.63,30.99 78.23,30.99 76.2,28.96 71.12,28.96 69.09,30.99 65.53,30.99 65.28,30.73 65.28,12.06 62.23,8.89 J5.3
TX+
  Top 0.508: JP7.4 74.93,24.13 74.93,26.29 75.69,27.05 76.71,27.05 77.72,26.04 79.76,26.04 80.64,25.15 U2.6
TX-
  Top 0.508: JP8.4 90.17,7.37 90.17,8.64 89.28,9.65 87.76,11.43 79.38,21.08 U2.5
V_ADJ
  Top 0.254: LDO1.2 19.05,30.73 22.86,34.54 24.85,34.54 R8.1 26.04,33.4 27.81,31.37 28.57,31.46 | 28.57,31.46 R9.2 | 28.57,31.46 28.74,31.62 29.72,31.62 30.23,31.11 C7.1 30.23,31.24 29.84,31.62 29.08,33.11 R10.2 29.08,33.4 28.07,33.91 28.07,35.69 TP3.TP
V_EN
  Top 0.254: LDO1.1 19.02,32.23 22.35,35.56 23.88,35.56 26.92,38.61 28.45,38.61 30.48,36.58 30.99,36.58 31.5,37.08 34.54,37.08 44.7,26.92 44.7,23.88 45.72,22.86 47.24,22.86 47.88,23.5 47.88,43.09 J6.17
V_LDO  (via drill 0.6)  (1 unrouted)
  Top 0.254: LDO1.3 19.05,29.21 22.35,32.51 23.41,32.51 R8.2 | OR1.5 61.85,58.55 61.59,58.8 60.2,58.8 59.94,58.55 59.78,58.55 C8.1 | OR2.5 20.45,54.48 20.83,54.36 21.34,53.47 20.75,52.36 | 20.75,52.36 C10.1 | OR3.5 83.57,50.29 | C9.1 84.81,50.9 83.8,50.27 83.57,50.29 | 57.78,54.74 57.78,54.89 U6.23 | 83.57,50.29 82.93,50.93 82.55,51.82 83.19,52.96 82.68,55.37 72.64,60.96 69.98,60.58 S01.6 | S11.6 24.89,54.36 24.89,53.34 23.37,52.32 20.79,52.32 20.75,52.36 | U5.24 U5.23 | R28.1 v9.14,16.76
  Top 0.406: C8.1 59.14,58.2 58.42,58.93 56.9,58.93 55.88,57.91 C13.1
  Top 0.508: 57.78,54.74 U6.24 56.3,56.22 C13.1 54.7,56.22 54.7,56.35 54.74,56.39 | 90.42,24.89 82.47,41.92 | 82.47,41.92 82.3,42.16 82.3,43.18 v68.07,54.86 66.55,51.56 50.55,51.56 49.28,52.83 40.13,52.83 38.86,53.72 38.86,55.24 | 39.59,55.84 C12.1 41.06,55.97 U5.24 | 39.59,55.84 38.86,55.24 | 38.86,55.24 40.64,57.15 | 28.15,51.49 v28.45,50.8 | 13.72,35.43 v13.21,35.56 | 54.74,56.26 54.74,56.39 | 54.74,56.39 54.74,58.04 53.85,58.93 53.85,59.94 53.34,60.45 v51.31,60.45 | v48.77,60.45 46.74,62.48 46.74,63.52 S12.6 46.46,64.79 45.09,65.79 43.05,65.79 41.66,64.52 v41.66,61.47 | v82.8,42.16 82.47,41.92 | 39.59,55.84 40.04,56.48 40.13,56.39 v40.64,57.4 | 11.94,29.21 11.56,28.7 9.53,18.8 v9.14,16.76 9.14,9.14 10.16,8.13 15.24,8.13 S06.6
  Top 0.61: 16.75,29.2 16.64,29.21 LDO1.3
  Top 0.813: 16.75,29.2 C6.1 13.72,28.45 12.7,28.45 11.94,29.21 11.81,29.34 11.68,33.53 13.72,35.43 TP1.TP 23.88,48.77 28.15,51.49 37.85,57.15 40.64,57.15
  Bottom 0.508: v13.21,35.56 S10.6 | v28.45,50.8 S11.6 | v9.14,16.76 S09.6 | v90.42,24.38 91.95,24.38 92.96,23.37 94.47,23.37 S03.6 | v82.8,42.16 S02.6 | v68.07,54.86 S01.6 | v41.66,61.47 v40.64,57.4 | v48.77,60.45 v51.31,60.45
V_TOGGLE
  Top 0.254: R10.1 30.61,33.4 31.75,32.26 32.89,32.26 | 32.89,32.26 33.02,32.38 | 33.02,32.38 33.02,33.02 | 33.02,33.02 R11.1 | 32.89,32.26 33.02,32.13 R12.2 33.02,32.38 | 33.02,33.02 31.5,34.54 31.5,36.07 32,36.58 34.04,36.58 44.2,26.42 44.2,21.84 45.72,20.32 47.24,20.32 49.28,18.29 56.39,18.29 56.9,17.78 62.48,17.78 63.5,18.8 63.5,22.86 J5.9
VIN
  Top 0.254: 17.65,25.02 C5.1
  Top 1.27: J6.3 51.56,8.89 58.93,1.91 | 58.93,1.91 64.39,1.91 65.02,2.54 65.02,9.65 67.06,11.68 67.06,13.21 68.07,14.22 70.36,14.22 X2.2 | 58.93,1.91 38.61,1.91 31.5,8.64 27.94,8.64 25.04,10.66 | 25.04,10.66 22.86,12.19 JP3.1 19.81,12.19 17.37,14.12 17.37,23.77 | 17.37,23.77 LDO1.4 17.37,25.81 17.91,25.27 17.91,24.89 17.53,24.51 17.53,24.89 17.65,25.02 | 17.37,23.77 17.78,24.38 18.8,21.34 | 17.78,19.81 18.8,21.34 | 18.8,21.34 17.53,21.59 17.53,22.1 17.78,19.81 | 17.78,19.81 TP2.TP | X1.2 28.86,14.48 25.04,10.66
(copper drawn outside any net)
  shapes: Top area x7

## Text on the board
Top: MJG7DF
tPlace: OR1 | OR2 | OR3 | Status- / Debug | #4-40 Screw / (0.13" Hole) | V_EN | V_ADJ | V_LDO | LDO1 | 5 3 1 | S/D / AN12 / AN11 / AN10 / AN9 / AN6 | VIN | 6 4 2 | SS | AN1 / FBSY / AN2 / AN3 / RBSY / PW3 / SD2 / SD1 / VTOG / PW1 / PW2 | Sonar PWR | GND | VIN | 5 3 1 | Sonar Sonsor Shield V2 / for Arduino Micro | Main Connector | 6 4 2 | Rear Expansion | BW / PW / AN / RX / TX / 5V / GND